# EAGLE board 1_phase (EAGLE 9.6.2)
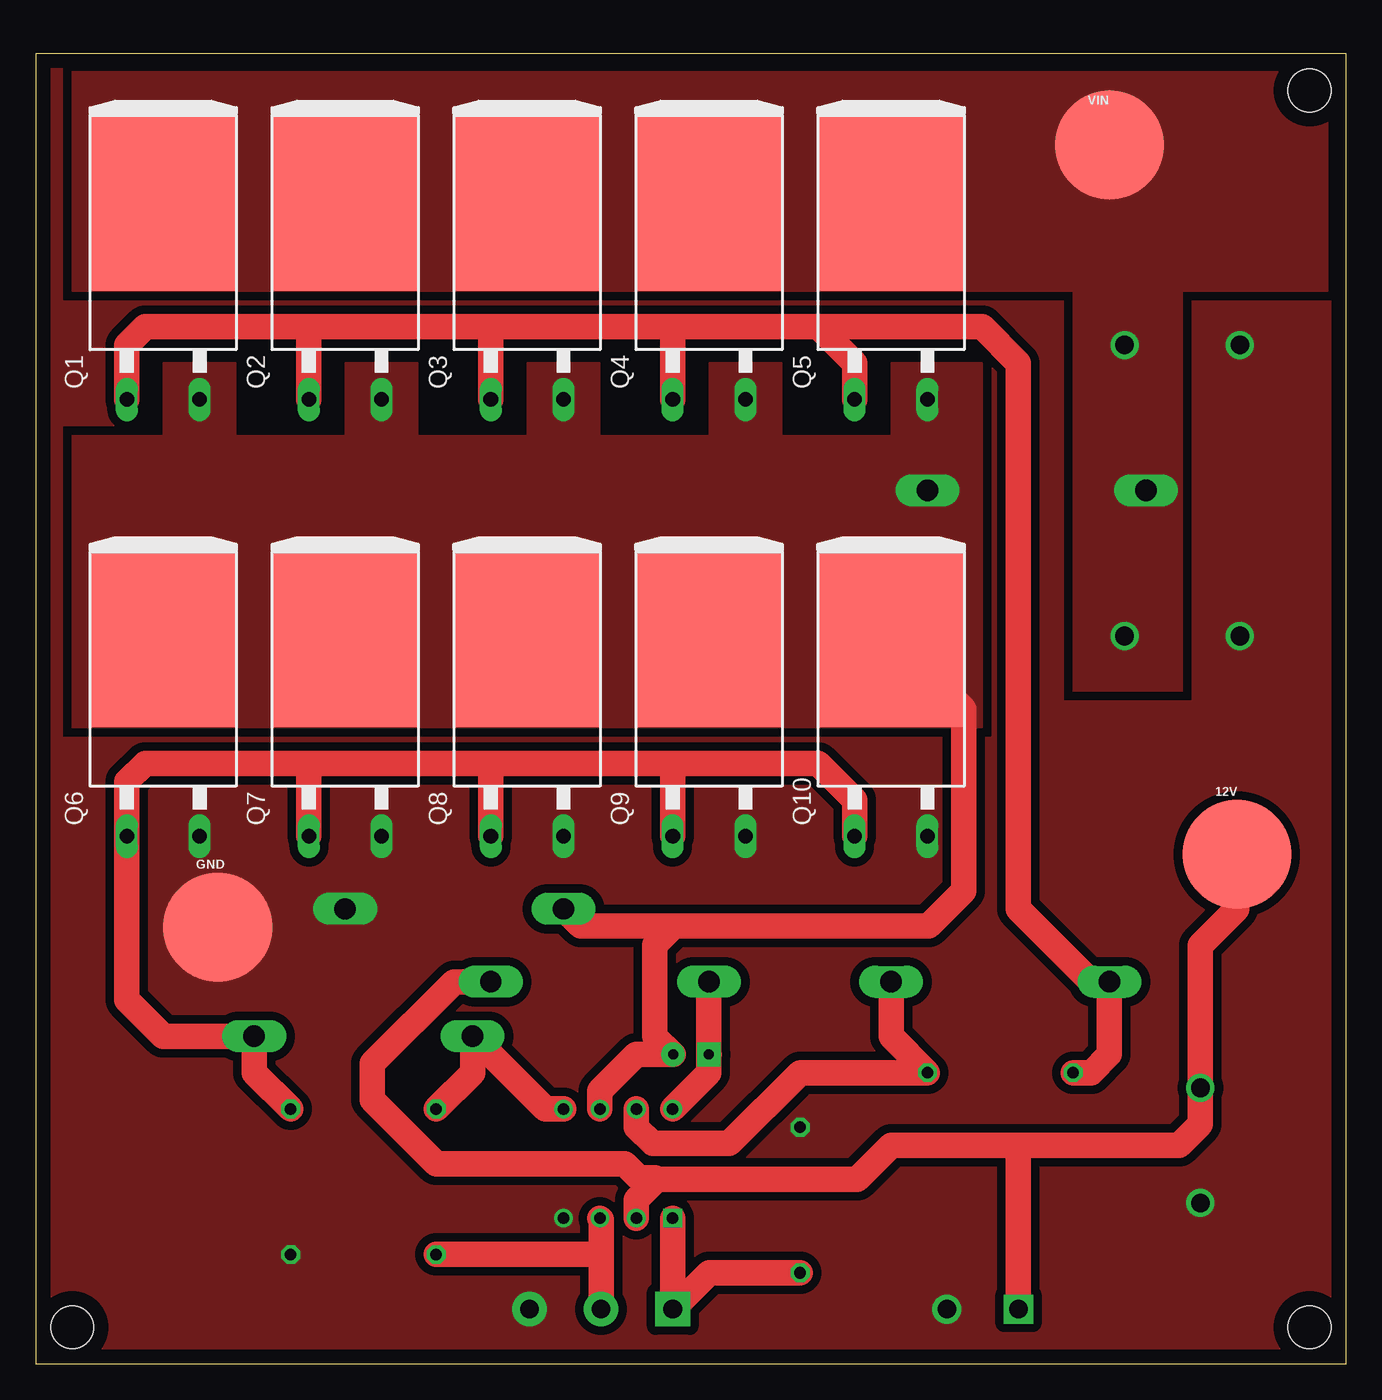
[diagram p0: board, top side]
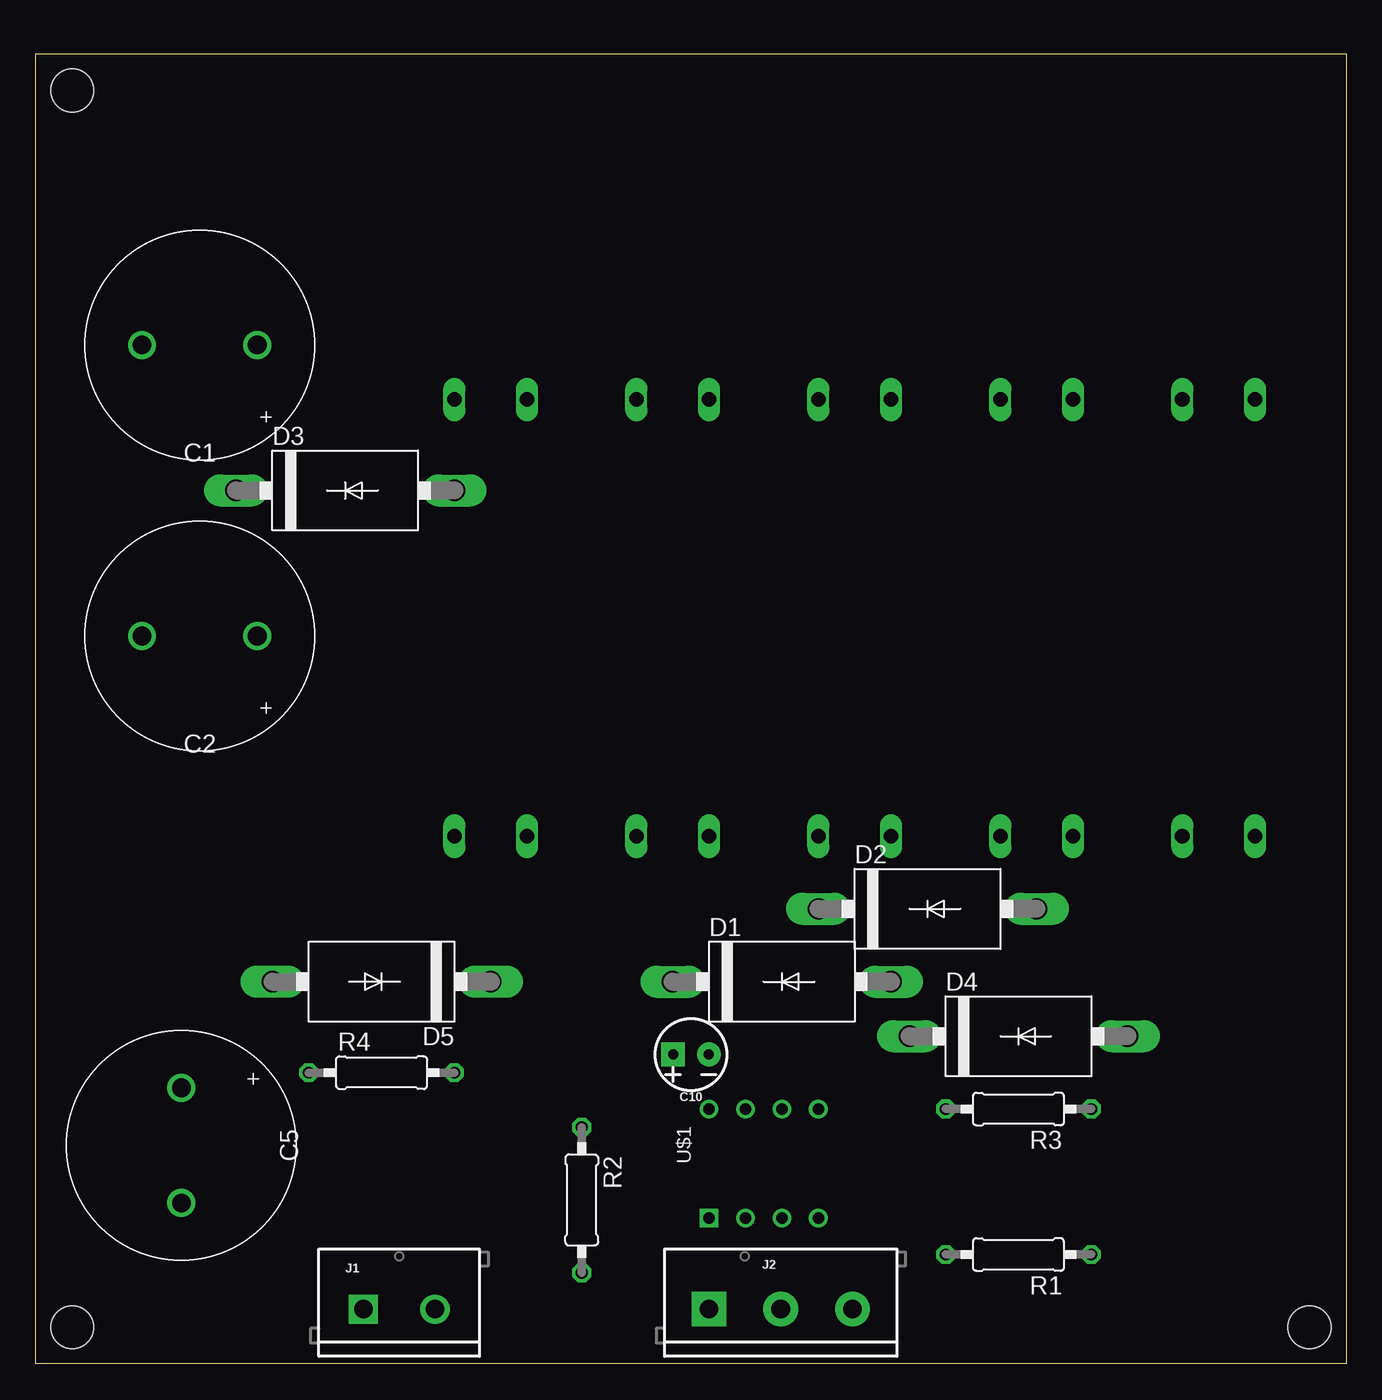
[diagram p1: board, bottom side, seen from below]

Size 91.44 x 91.44 mm. Coordinates in mm from the lower left corner, seen from the top.
Outline: 0,0 91.44,0 91.44,91.44 0,91.44 0,0
Copper layers (1*16): Top 0.035mm / dielectric 1.5mm / Bottom 0.035mm
Design rules "cnc_0.6_eagle_ayarlar": minimum track width 6mil, minimum drill 0.35mm, track to track 0.6mm, track to pad 0.6mm, pad to pad 0.6mm, via to via 0.6mm, smd to smd 0.6mm, copper to edge 40mil, drill to drill 0.6mm, minimum pad ring 10mil, minimum via ring 8mil, stop-mask expansion 4mil, vias tented up to drill 0mil, thermal gap 0.6mm
Holes 3 mm at 88.9,88.9 88.9,2.54 2.54,2.54

## Footprints (pad centres in the part's own frame; a part is rotated, then mirrored left to right if it is on the bottom)
SNAP-MALE = smd 7.62 x 7.62: 2 0,0
16MM-DIA-CAPASITOR = drill 1.3 pad 1.95: + -4.02,0; - 4.02,0
CPOL-RADIAL-2.5MM-5MM = drill 0.7 pad 1.651 square: 1 1.25,0 | drill 0.7 pad 1.651: 2 -1.25,0
DO201-15 = drill 1.499 long: A 7.62,0; C -7.62,0
SCREWTERMINAL-5MM-2 = drill 1.3 pad 2.032 square: 1 0,0 | drill 1.3 pad 2.032: 2 5,0
SCREWTERMINAL-5MM-3 = drill 1.3 pad 2.413 square: 1 0,0 | drill 1.3 pad 2.413: 2 5,0; 3 10,0
TO-220-PAD = drill 1.016 long: 1 -2.54,-8.89; 3 2.54,-8.89 | smd 10.16 x 12.7: TAB 0,5.08
0207/10 = drill 0.813 octagon: 1 -5.08,0; 2 5.08,0
DIP-8 = drill 0.8 square: 1 -3.81,3.81 | drill 0.8: 2 -3.81,1.27; 3 -3.81,-1.27; 4 -3.81,-3.81; 5 3.81,-3.81; 6 3.81,-1.27; 7 3.81,1.27; 8 3.81,3.81

## Placement (x,y rotation side)
12V  [SNAP-MALE]  83.82,35.56 0 top
C1  [16MM-DIA-CAPASITOR]  80.01,71.12 180 bottom
C2  [16MM-DIA-CAPASITOR]  80.01,50.8 180 bottom
C5  [16MM-DIA-CAPASITOR]  81.28,15.24 270 bottom
C10  2.2uF  [CPOL-RADIAL-2.5MM-5MM]  45.72,21.59 180 bottom
D1  1N5400  [DO201-15]  39.37,26.67 0 bottom
D2  1N5400  [DO201-15]  29.21,31.75 0 bottom
D3  1N5400  [DO201-15]  69.85,60.96 0 bottom
D4  1N5400  [DO201-15]  22.86,22.86 0 bottom
D5  1N5400  [DO201-15]  67.31,26.67 180 bottom
GND  [SNAP-MALE]  12.7,30.48 0 top
J1  [SCREWTERMINAL-5MM-2]  68.58,3.81 0 bottom
J2  [SCREWTERMINAL-5MM-3]  44.45,3.81 0 bottom
Q1  IRF640N  [TO-220-PAD]  8.89,76.2 0 top
Q2  IRF640N  [TO-220-PAD]  21.59,76.2 0 top
Q3  IRF640N  [TO-220-PAD]  34.29,76.2 0 top
Q4  IRF640N  [TO-220-PAD]  46.99,76.2 0 top
Q5  IRF640N  [TO-220-PAD]  59.69,76.2 0 top
Q6  IRF640N  [TO-220-PAD]  8.89,45.72 0 top
Q7  IRF640N  [TO-220-PAD]  21.59,45.72 0 top
Q8  IRF640N  [TO-220-PAD]  34.29,45.72 0 top
Q9  IRF640N  [TO-220-PAD]  46.99,45.72 0 top
Q10  IRF640N  [TO-220-PAD]  59.69,45.72 0 top
R1  10k  [0207/10]  22.86,7.62 180 bottom
R2  10k  [0207/10]  53.34,11.43 270 bottom
R3  27  [0207/10]  22.86,17.78 180 bottom
R4  27  [0207/10]  67.31,20.32 0 bottom
U$1  IR2104PBF  [DIP-8]  40.64,13.97 90 bottom
VIN  [SNAP-MALE]  74.93,85.09 0 top

## Library data of the parts
12V GND VIN = SparkFun-Connectors
C1 C2 C5 Q1-Q10 U$1 = El_yapimi
C10 = SparkFun-Capacitors; PROD_ID: CAP-08440
D1-D5 = diode
J1 = SparkFun-Connectors; SF_SKU: PRT-08432
J2 = SparkFun-Connectors; PROD_ID: CONN-10134; SF_SKU: PRT-08433
R1-R4 = resistor

## Nets
12V: 12V.2 C5.+ D1.A J1.1 U$1.2
FAZ: C10.2 D2.C D3.A Q1.3 Q2.3 Q3.3 Q4.3 Q5.3 Q6.TAB Q7.TAB Q8.TAB Q9.TAB Q10.TAB U$1.6
FAZ_A_L: D4.A Q6.1 Q7.1 Q8.1 Q9.1 Q10.1 R3.1
FAZ_IN: J2.1 R2.2 U$1.1
FAZ_ON: J2.2 R1.2 U$1.3
GND: C1.- C2.- C5.- D2.A GND.2 J1.2 J2.3 Q6.3 Q7.3 Q8.3 Q9.3 Q10.3 R1.1 R2.1 U$1.4
N$1: D5.A Q1.1 Q2.1 Q3.1 Q4.1 Q5.1 R4.1
N$2: C10.1 D1.C U$1.8
N$3: D4.C R3.2 U$1.5
N$5: D5.C R4.2 U$1.7
VIN: C1.+ C2.+ D3.C Q1.TAB Q2.TAB Q3.TAB Q4.TAB Q5.TAB VIN.2

## Tracks (layer width: path | path; a pad name or v marks a point on that pad's centre or on a via)
12V
  Top 1.778: 12V.2 83.82,31.75 81.28,29.21 C5.+ 81.28,16.72 79.8,15.24 68.58,15.24 | 68.58,15.24 59.69,15.24 57.31,12.86 43.34,12.86 | U$1.2 41.91,11.43 43.34,12.86 | 43.34,12.86 43.22,12.99 42.07,12.99 41.09,13.97 27.94,13.97 23.5,18.41 23.5,20.95 29.21,26.67 D1.A | J1.1 68.58,15.24
FAZ
  Top 1.778: U$1.6 39.37,19.05 41.91,21.59 C10.2 43.2,22.86 43.2,29.23 44.52,30.55 | Q10.TAB 64.77,45.72 64.77,33.02 62.3,30.55 44.52,30.55 | 44.52,30.55 38.03,30.55 D2.C
  pour Top (no thermals): 8.89,69.85 8.89,64.77 2.54,64.77 2.54,44.45 66.04,44.45 66.04,69.85 59.69,69.85 59.69,64.77 52.07,64.77 52.07,69.85 46.99,69.85 46.99,64.77 39.37,64.77 39.37,69.85 34.29,69.85 34.29,64.77 26.67,64.77 26.67,69.85 21.59,69.85 21.59,64.77 13.97,64.77 13.97,69.85
FAZ_A_L
  Top 1.778: 19.05,41.91 7.62,41.91 6.35,40.64 Q6.1 6.35,25.4 8.89,22.86 D4.A 15.24,20.32 R3.1 | 19.05,41.91 31.75,41.91 | 31.75,41.91 44.45,41.91 | 44.45,41.91 54.61,41.91 57.15,39.37 Q10.1 | Q9.1 44.45,41.91 | Q8.1 31.75,41.91 | Q7.1 19.05,41.91
FAZ_IN
  Top 1.778: U$1.1 J2.1 46.99,6.35 R2.2
FAZ_ON
  Top 1.778: R1.2 39.45,7.62 | J2.2 39.45,7.62 | 39.45,7.62 39.45,10.08 U$1.3
GND
  pour Top (rank 4, no thermals): -1.27,92.71 -1.27,-1.27 92.71,-1.27 92.71,92.71
N$1
  Top 1.778: Q1.1 6.35,71.12 7.62,72.39 19.05,72.39 | 19.05,72.39 31.75,72.39 | 31.75,72.39 44.45,72.39 | 44.45,72.39 54.61,72.39 | 54.61,72.39 57.15,69.85 Q5.1 | Q4.1 44.45,72.39 | Q3.1 31.75,72.39 | Q2.1 19.05,72.39 | 54.61,72.39 66.04,72.39 68.58,69.85 68.58,31.75 73.66,26.67 D5.A 74.93,21.59 73.66,20.32 R4.1
N$2
  Top 1.778: C10.1 46.99,21.61 | U$1.8 46.97,20.3 C10.1 | D1.C 46.97,26.65 C10.1
N$3
  Top 1.778: R3.2 30.48,20.32 D4.C 35.56,17.78 U$1.5
N$5
  Top 1.778: D5.C 59.69,22.86 R4.2 53.34,20.32 48.39,15.37 43.05,15.37 41.91,16.51 U$1.7
VIN
  pour Top (no thermals): 2.54,90.17 2.54,74.93 72.39,74.93 72.39,46.99 80.01,46.99 80.01,74.93 90.17,74.93 90.17,90.17